# EAGLE board Keyboard_BOTTOM (EAGLE 8.2.2)
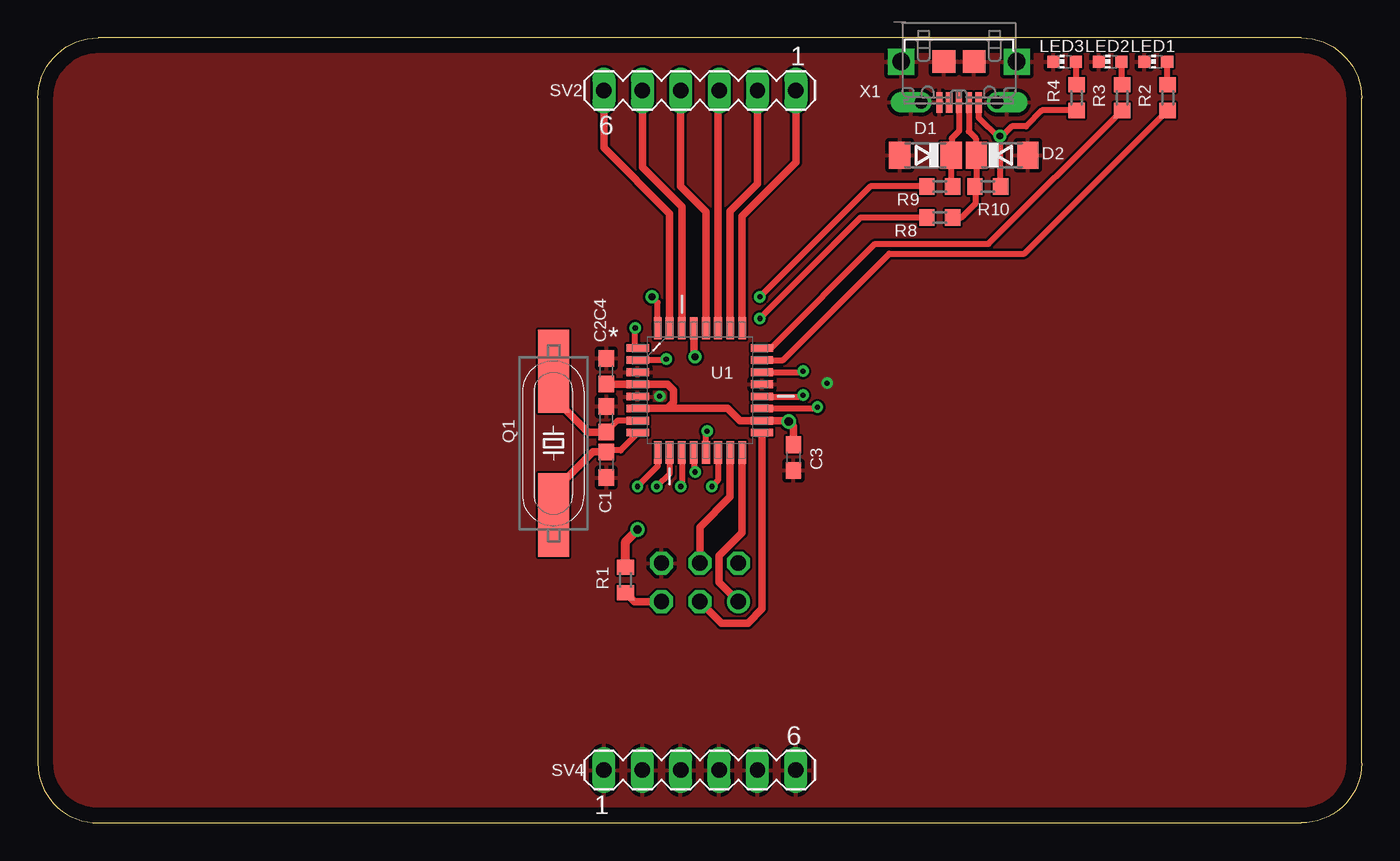
[diagram p0: board, top side]
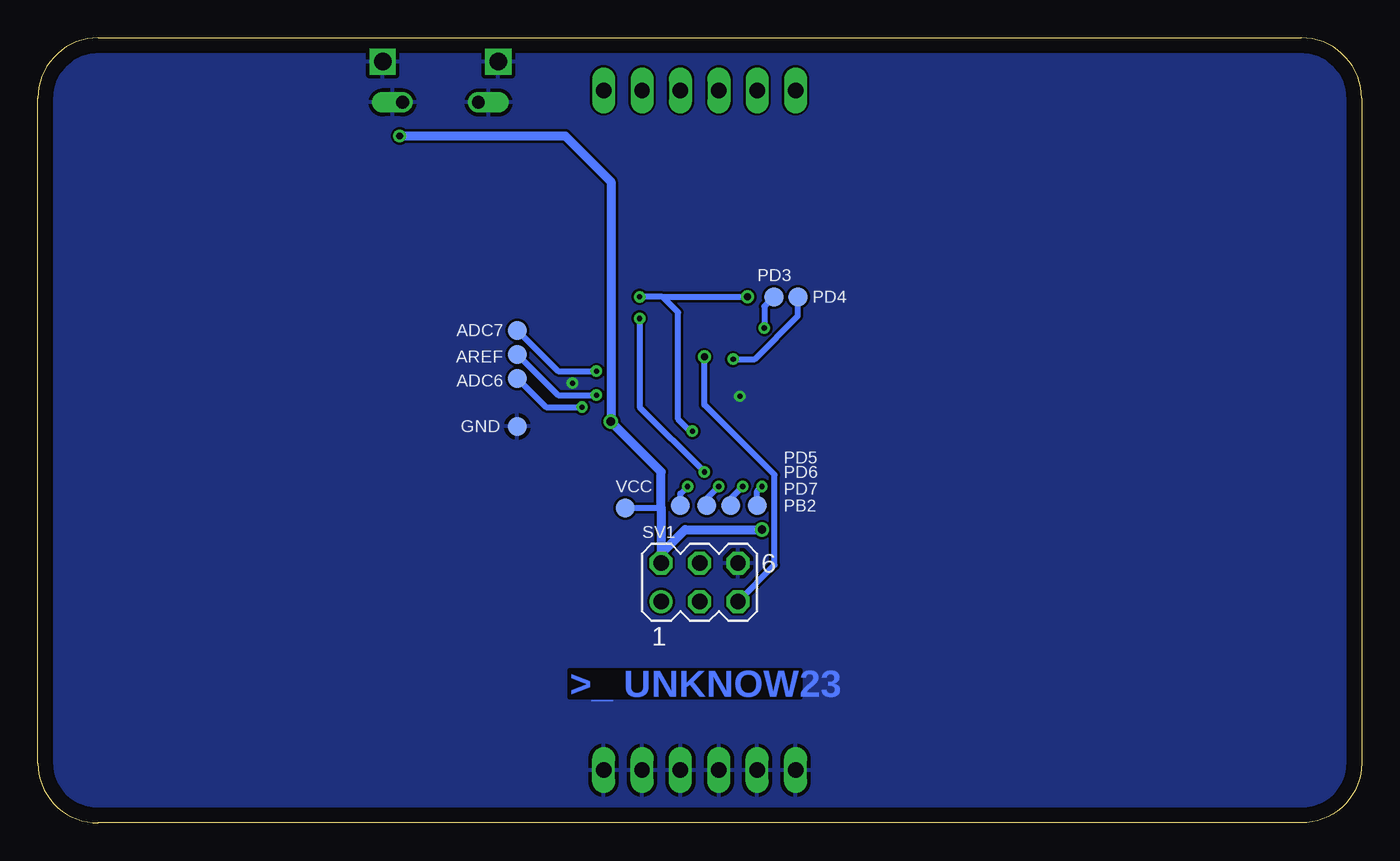
[diagram p1: board, bottom side, seen from below]

Size 87.61 x 51.93 mm. Coordinates in mm from the lower left corner, seen from the top.
Outline: 87.61,3.93 87.61,47.93 arc90 83.61,51.93 4,51.93 arc90 0,47.93 0,3.93 arc90 4,0 83.61,0 arc90 87.61,3.93
Copper layers (1*16): Top 0.035mm / dielectric 1.5mm / Bottom 0.035mm
Design rules "default *": minimum track width 6mil, minimum drill 0.35mm, track to track 6mil, track to pad 6mil, pad to pad 6mil, via to via 6mil, smd to smd 6mil, copper to edge 40mil, drill to drill 6mil, minimum pad ring 10mil, minimum via ring 8mil, stop-mask expansion 4mil, vias tented up to drill 0mil, thermal gap 10mil

## Footprints (pad centres in the part's own frame; a part is rotated, then mirrored left to right if it is on the bottom)
B1,27 = smd 1.27 x 1.27: TP 0,0
C0603 = smd 1.1 x 1: 1 -0.85,0; 2 0.85,0
SOD80C = smd 1.4 x 1.8: A 1.7,0; C -1.7,0
CHIP-LED0603 = smd 0.8 x 0.8: A 0,-0.75; C 0,0.75
11.4X4.5 = smd 5.5 x 2.08: 1 -4.75,0; 2 4.75,0
R0603 = smd 1 x 1.1: 1 -0.85,0; 2 0.85,0
MA03-2 = drill 1.016: 1 -2.54,-1.27 | drill 1.016 octagon: 2 -2.54,1.27; 3 0,-1.27; 4 0,1.27; 5 2.54,-1.27; 6 2.54,1.27
MA06-1 = drill 1.016 long: 1 -6.35,0; 2 -3.81,0; 3 -1.27,0; 4 1.27,0; 5 3.81,0; 6 6.35,0
QFP80P900X900X120-32N = smd 1.473 x 0.508: 1 -4.115,2.794; 2 -4.115,2.007; 3 -4.115,1.194; 4 -4.115,0.406; 5 -4.115,-0.406; 6 -4.115,-1.194; 7 -4.115,-2.007; 8 -4.115,-2.794; 17 4.115,-2.794; 18 4.115,-2.007; 19 4.115,-1.194; 20 4.115,-0.406; 21 4.115,0.406; 22 4.115,1.194; 23 4.115,2.007; 24 4.115,2.794 | smd 0.508 x 1.473: 9 -2.794,-4.115; 10 -2.007,-4.115; 11 -1.194,-4.115; 12 -0.406,-4.115; 13 0.406,-4.115; 14 1.194,-4.115; 15 2.007,-4.115; 16 2.794,-4.115; 25 2.794,4.115; 26 2.007,4.115; 27 1.194,4.115; 28 0.406,4.115; 29 -0.406,4.115; 30 -1.194,4.115; 31 -2.007,4.115; 32 -2.794,4.115
4UCONN_20329_V2 = smd 1.5 x 1.5: BASE@1 -1,0; BASE@2 1,0 | smd 0.4 x 1.35: D+ 0,2.7; D- -0.65,2.7; GND 1.3,2.7; ID 0.65,2.7; VBUS -1.3,2.7 | drill 0.85 pad 1.2 offset: SPRT@1 -2.5,2.7; SPRT@2 2.5,2.7 | drill 1.15 pad 1.55 square: SPRT@3 -3.825,0; SPRT@4 3.825,0

## Placement (x,y rotation side)
ADC6  TPB1,27  [B1,27]  55.88,29.4 0 bottom
ADC7  TPB1,27  [B1,27]  55.88,32.58 0 bottom
AREF  TPB1,27  [B1,27]  55.88,30.99 0 bottom
C1  22p  [C0603]  37.62,23.68 270 top
C2  22p  [C0603]  37.62,26.7 90 top
C3  4.7u  [C0603]  50.01,24.16 270 top
C4  100n  [C0603]  37.62,29.88 90 top
D1  3V6  [SOD80C]  58.74,44.16 180 top
D2  3V6  [SOD80C]  63.82,44.16 0 top
GND  TPB1,27  [B1,27]  55.88,26.23 0 bottom
LED1  [CHIP-LED0603]  73.98,50.35 90 top
LED2  [CHIP-LED0603]  70.96,50.35 90 top
LED3  [CHIP-LED0603]  67.94,50.35 90 top
PB2  TPB1,27  [B1,27]  45.09,20.99 0 bottom
PD3  TPB1,27  [B1,27]  38.89,34.8 0 bottom
PD4  TPB1,27  [B1,27]  37.31,34.8 0 bottom
PD5  TPB1,27  [B1,27]  40.01,20.99 0 bottom
PD6  TPB1,27  [B1,27]  41.75,20.99 0 bottom
PD7  TPB1,27  [B1,27]  43.34,20.99 0 bottom
Q1  12MHz  [11.4X4.5]  34.13,25.11 90 top
R1  10k  [R0603]  38.89,16.07 90 top
R2  1k  [R0603]  74.77,47.97 90 top
R3  1k  [R0603]  71.75,47.97 90 top
R4  1k  [R0603]  68.74,47.97 270 top
R8  68R  [R0603]  59.69,40.04 0 top
R9  68R  [R0603]  59.69,42.1 0 top
R10  2k2  [R0603]  62.87,42.1 180 top
SV1  [MA03-2]  43.81,15.91 0 bottom
SV2  [MA06-1]  43.81,48.45 180 top
SV4  [MA06-1]  43.81,3.49 0 top
U1  ATMEGA8A-AU  [QFP80P900X900X120-32N]  43.81,28.61 0 top
VCC  TPB1,27  [B1,27]  48.74,20.83 0 bottom
X1  [4UCONN_20329_V2]  60.96,50.35 180 top

## Library data of the parts
ADC6 ADC7 AREF GND PB2 PD3-PD7 VCC = testpad
C1-C4 R1-R4 R8-R10 = resistor
D1 D2 = diode
LED1-LED3 = led
Q1 = crystal-geyer_V1_0
SV1 SV2 SV4 = con-lstb; OC_FARNELL: unknown; OC_NEWARK: unknown
U1 = Atmel_By_element14_Batch_1-00; MPN: ATMEGA8A-AU; OC_FARNELL: 1748532; OC_NEWARK: 26R5638; PACKAGE: TQFP-32; SUPPLIER: Atmel
X1 = microbuilder

## Nets
COL1: SV2.1 U1.25
COL2: SV2.2 U1.26
COL3: SV2.3 U1.27
COL4: SV2.4 U1.28
D+: R9.1 U1.13 U1.32
D-: R8.1 U1.12
GND: C1.2 C2.2 C3.2 C4.2 D1.A D2.A GND.TP LED1.C LED2.C LED3.C SV1.6 SV4.1 SV4.2 SV4.3 SV4.4 SV4.5 SV4.6 U1.3 U1.5 U1.21 X1.BASE@1 X1.BASE@2 X1.GND X1.SPRT@1 X1.SPRT@2 X1.SPRT@3 X1.SPRT@4
MISO: SV1.1 U1.16
MOSI: SV1.4 U1.15
N$1: C1.1 Q1.1 U1.8
N$2: C2.1 Q1.2 U1.7
N$3: LED3.A R4.1
N$4: R3.1 U1.24
N$5: R2.1 U1.23
N$6: LED1.A R2.2
N$7: LED2.A R3.2
N$9: D1.C R9.2 X1.D+
N$10: D2.C R8.2 R10.2 X1.D-
N$14: PD7.TP U1.11
N$17: PD6.TP U1.10
N$19: PD5.TP U1.9
N$21: PD4.TP U1.2
N$23: PD3.TP U1.1
N$25: AREF.TP U1.20
N$27: ADC7.TP U1.22
N$29: ADC6.TP U1.19
N$30: PB2.TP U1.14
RESET: R1.1 SV1.5 U1.29
ROW1: SV2.5 U1.30
ROW2: SV2.6 U1.31
SCK: SV1.3 U1.17
VCC: C3.1 C4.1 R1.2 R4.2 R10.1 SV1.2 U1.4 U1.6 U1.18 VCC.TP X1.VBUS

## Tracks (layer width: path | path; a pad name or v marks a point on that pad's centre or on a via)
COL1
  Top 0.508: U1.25 46.61,40.13 50.16,43.69 SV2.1
COL2
  Top 0.508: U1.26 45.82,40.45 47.62,42.26 SV2.2
COL3
  Top 0.508: U1.27 45.01,48.37 SV2.3
COL4
  Top 0.508: U1.28 44.22,40.42 42.55,42.1 SV2.4
D+  (via drill 0.35, 0.45)
  Top 0.406: R9.1 55.09,42.1 v47.78,34.8 | 41.02,32.99 41.02,34.42 v40.64,34.8 | U1.13 44.22,25.68 v44.29,25.91
  Top 0.508: U1.32 41.02,32.99
  Bottom 0.406: 46.28,34.8 v47.78,34.8 | 46.28,34.8 v40.64,34.8 | 46.28,34.8 45.24,33.76 45.24,26.7 44.45,25.91 v44.29,25.91
D-  (via drill 0.35)
  Top 0.406: U1.12 43.41,23.3 v43.5,23.21 | R8.1 54.45,40.04 v47.78,33.37
  Bottom 0.406: v47.78,33.37 47.78,27.5 v43.5,23.21
GND  (via drill 0.35)
  other vias: 41.15,28.22 52.23,29.08
  pour Top: 0,-1.07 88.63,-1.07 88.63,52.26 0,52.26
  pour Bottom: 0,-1.07 88.63,-1.07 88.63,52.26 0,52.26
MISO
  Top 0.508: U1.16 46.61,19.18 45.09,17.65 45.09,15.91 SV1.1
MOSI
  Top 0.508: SV1.4 43.81,19.56 45.82,21.56 U1.15
N$1
  Top 0.406: U1.8 39.7,25.76 38.58,24.64 37.73,24.64 C1.1
  Top 0.508: C1.1 36.73,24.54 34.45,22.26 34.45,20.68 Q1.1
N$2
  Top 0.406: U1.7 38.37,26.6 C2.1
  Top 0.508: C2.1 36.41,25.85 34.61,27.65 34.61,29.39 Q1.2
N$3
  Top 0.406: LED3.A 68.69,48.87 R4.1
N$4
  Top 0.406: U1.24 48.51,31.4 55.4,38.29 62.92,38.29 R3.1
N$5
  Top 0.406: U1.23 49.31,30.61 56.36,37.66 65.3,37.66 R2.1
N$6
  Top 0.406: LED1.A 74.73,48.87 R2.2
N$7
  Top 0.406: LED2.A 71.71,48.87 R3.2
N$9
  Top 0.406: X1.D+ 60.96,45.75 60.48,45.27 60.48,44.21 D1.C 60.44,42.2 R9.2
N$10
  Top 0.406: X1.D- 61.61,45.74 62.07,45.27 62.07,44.21 D2.C 62.12,42.2 R10.2 62.07,42.04 62.07,40.99 61.12,40.04 R8.2
N$14  (via drill 0.35)
  Top 0.406: U1.11 42.62,22.33 v42.55,22.26
  Bottom 0.406: PD7.TP 43.34,21.46 v42.55,22.26
N$17  (via drill 0.35)
  Top 0.406: U1.10 41.81,23.11 v40.96,22.26
  Bottom 0.406: PD6.TP 41.75,21.46 v40.96,22.26
N$19  (via drill 0.35)
  Top 0.406: U1.9 41.02,23.59 v39.69,22.26
  Bottom 0.406: PD5.TP 40.01,21.94 v39.69,22.26
N$21  (via drill 0.35)
  Top 0.406: v41.59,30.67 41.53,30.61 U1.2
  Bottom 0.406: v41.59,30.67 40.16,30.67 37.31,33.53 PD4.TP
N$23  (via drill 0.35)
  Top 0.406: U1.1 39.53,31.57 v39.53,32.73
  Bottom 0.406: PD3.TP 39.53,34.16 v39.53,32.73
N$25  (via drill 0.35)
  Top 0.406: U1.20 50.55,28.2 v50.64,28.29
  Bottom 0.406: AREF.TP 53.18,28.29 v50.64,28.29
N$27  (via drill 0.35)
  Top 0.406: U1.22 50.56,29.8 v50.64,29.88
  Bottom 0.406: ADC7.TP 53.18,29.88 v50.64,29.88
N$29  (via drill 0.35)
  Top 0.406: U1.19 51.51,27.41 v51.59,27.5
  Bottom 0.406: ADC6.TP 53.98,27.5 v51.59,27.5
N$30  (via drill 0.35)
  Top 0.406: U1.14 45.01,22.66 v44.61,22.26
  Bottom 0.406: PB2.TP 45.09,21.78 v44.61,22.26
RESET  (via drill 0.45)
  Top 0.508: U1.29 43.41,30.92 v43.5,30.83 | SV1.5 39.47,14.64 R1.1
  Bottom 0.406: v43.5,30.83 43.5,27.65 38.85,23.01 38.85,17.06 SV1.5
ROW1
  Top 0.508: U1.30 42.62,40.75 40.01,43.37 SV2.5
ROW2
  Top 0.508: U1.31 41.81,40.3 37.47,44.64 SV2.6
SCK
  Top 0.508: U1.17 47.93,14.15 46.99,13.21 45.24,13.21 SV1.3
VCC  (via drill 0.45, 0.55)
  Top 0.406: X1.VBUS 62.26,46.67 63.66,45.27 | 63.66,45.27 63.66,42.16 R10.1 | R4.2 66.46,47.12 65.41,46.07 64.45,46.07 63.66,45.27 | v63.66,45.43 63.66,45.27
  Top 0.508: C4.1 37.64,29.01 U1.4 41.66,29.01 42.07,28.61 42.07,27.81 41.67,27.41 | U1.6 41.67,27.41 | v49.69,26.54 49.63,26.6 U1.18 46.46,26.6 45.64,27.41 41.67,27.41 | 49.85,26.7 v49.69,26.54 | C3.1 50.01,26.23 v49.69,26.54
  Top 0.61: R1.2 38.89,18.61 v39.69,19.4
  Bottom 0.406: VCC.TP 46.36,20.83 46.35,20.83
  Bottom 0.61: v39.69,19.4 44.77,19.4 46.35,17.81 SV1.2 46.35,20.83 46.35,23.21 v49.69,26.54 49.69,42.42 52.7,45.43 v63.66,45.43

## Text on the board
Bottom: >_ UNKNOW23
bStop: >_ UNKNOW23